# Allegro board fmc_tlu_cfd_04.brd
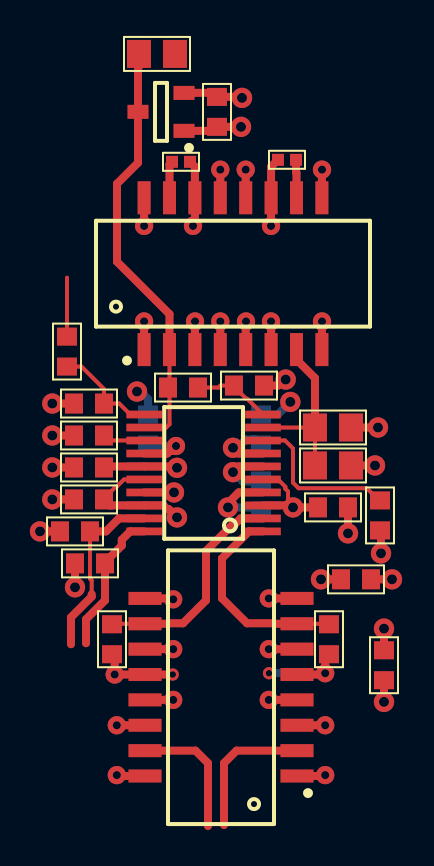
[diagram p0: board, top side]
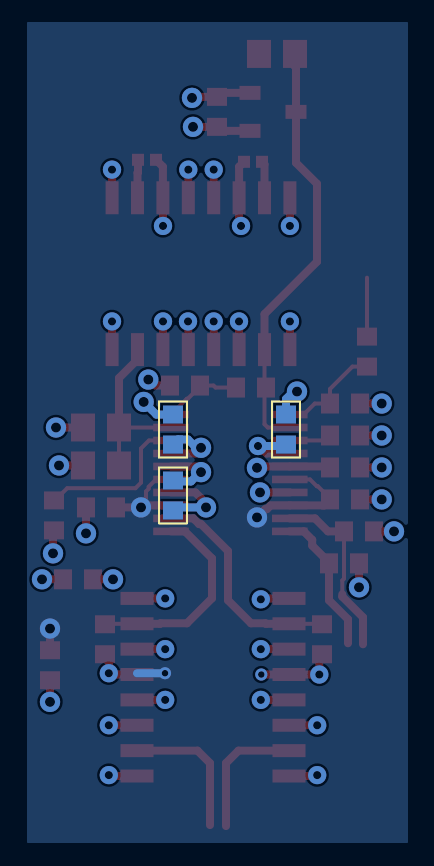
[diagram p1: board, bottom side, seen from below]

No outline. copper layers: TOP, LAYER2, LAYER3, LAYER4, LAYER5, BOTTOM. Coordinates in mm from the lowest, leftmost part position.

## Design rules (mm)
constraint set DEFAULT: min track width 0.127

## Placement (name value [footprint] x y rotation side)
C1  100nF  [C0603]  7.5 28.8 90 top
C2  10nF  [C0603]  1.1 14.2 0 top
C3  1.0uF  [C0603]  15.85 1.1 90 top
C4  1.0uF  [C0603]  14.45 5.4 0 top
C5  100nF  [C0603]  13.3 9 180 top
C6  1.0uF  [C0603]  1.1 11 0 top
C7  100nF  [C0603]  9.7 12.9 270 bottom
C8  100nF  [C0603]  1.1 9.4 0 top
C9  100nF  [C0603]  9.7 9.6 90 bottom
C10  100nF  [C0603]  4.05 12.9 270 bottom
D1  -  [SOT95P240X130-3N]  4.7 28.8 180 top
IC1  -  [SOIC127P835X237-16N]  8.3 20.7 90 top
IC2  -  [TSSOP20MA_065]  9.8 7.8 90 top
IC3  -  [SOIC127P835X237-16N]  7.7 0 180 top
R1  51  [C0402]  5.7 26.3 180 top
R2  12  [C0805]  4.5 31.7 180 top
R3  51  [C0603]  5.8 15 0 top
R4  51  [C0402]  11 26.4 0 top
R5  100  [C0603]  0 16.8 270 top
R6  100  [C0805]  13.3 13 180 top
R7  100  [C0603]  9.1 15.1 180 top
R8  100  [C0805]  13.3 11.1 180 top
R9  33k  [C0603]  1.1 12.6 0 top
R10  XX  [C0603]  15.65 8.6 90 top
R11  75  [C0603]  0.4 7.8 0 top
R12  75  [C0603]  2.25 2.4 90 top
R13  75  [C0603]  1.15 6.2 0 top
R14  75  [C0603]  13.1 2.4 90 top

## Library data of the parts
C1 C5 C7-C10 = CAPCERSMDCL2: part number: CAPCERSMDCL2_0603-100NF,16V; tolerance: 10%
C2 = CAPCERSMDCL2: part number: CAPCERSMDCL2_0603-10NF,50V; tolerance: 10%
C3 C4 C6 = CAPCERSMDCL2: part number: CAPCERSMDCL2_0603-1.0UF,6.3V; tolerance: 10%
D1 = DIODE_DUAL_SERIES: part number: HBAT-540C
IC1 = DELAY_LINE_GL2L: part number: GL2L5LS050D-C
IC2 = MAX9601
IC3 = DELAY_LINE_GL2L: part number: GL2L5LS100D-C
R1 R4 = RSMD0402: part number: RSMD0402_1/16W-51,1%; tolerance: 1%
R2 = RSMD0805: part number: RSMD0805_125MW-12,1%; tolerance: 1%
R3 = RSMD0603: part number: RSMD0603_1/10W-51,1%; tolerance: 1%
R5 R7 = RSMD0603: part number: RSMD0603_1/10W-100,1%; tolerance: 1%
R6 R8 = RSMD0805: part number: RSMD0805_125MW-100,1%; tolerance: 1%
R9 = RSMD0603: part number: RSMD0603_1/10W-33K,1%; tolerance: 1%
R10 = RSMD0603: part number: RSMD0603_1/10W-XX,1%; tolerance: 1%
R11-R14 = RSMD0603: part number: RSMD0603_1/10W-75,1%; tolerance: 1%

## Footprints (pads in the part's own frame, mm; a bottom-side part is the same pattern mirrored in y, then rotated)
C0402
  rect 0.6x0.6 smd: 1(-0.45,0) 2(0.45,0)
C0603
  rect 0.9x1 smd: 1(-0.75,0) 2(0.75,0)
C0805
  rect 1.2x1.4 smd: 1(-0.9,0) 2(0.9,0)
SOIC127P835X237-16N
  rect 1.65x0.65 smd: 1(-3.8,4.445) 2(-3.8,3.175) 3(-3.8,1.905) 4(-3.8,0.635) 5(-3.8,-0.635) 6(-3.8,-1.905) 7(-3.8,-3.175) 8(-3.8,-4.445) 9(3.8,-4.445) 10(3.8,-3.175) 11(3.8,-1.905) 12(3.8,-0.635) 13(3.8,0.635) 14(3.8,1.905) 15(3.8,3.175) 16(3.8,4.445)
SOT95P240X130-3N
  rect 1.05x0.7 smd: 1(-1.15,0.95) 2(-1.15,-0.95) 3(1.15,0)
TSSOP20MA_065
  rect 0.381x1.778 smd: 1(0,0) 2(0.65,0) 3(1.3,0) 4(1.95,0) 5(2.6,0) 6(3.25,0) 7(3.9,0) 8(4.55,0) 9(5.2,0) 10(5.85,0) 11(5.85,5.94) 12(5.2,5.94) 13(4.55,5.94) 14(3.9,5.94) 15(3.25,5.94) 16(2.6,5.94) 17(1.95,5.94) 18(1.3,5.94) 19(0.65,5.94) 20(0,5.94)

## Nets
GND_SIGNAL: C2.1(A<0>) C3.1(A<0>) C4.1(A<0>) C5.1(A<0>) C6.1(A<0>) C7.1(A<0>) C8.1(A<0>) C9.1(A<0>) C10.1(A<0>) IC1.1(SH<0>) IC1.3(SH<1>) IC1.4(SH<2>) IC1.5(SH<3>) IC1.6(SH<4>) IC1.8(SH<5>) IC1.9(SH<6>) IC1.11(SH<7>) IC1.12(SH<8>) IC1.13(SH<9>) IC1.14(SH<10>) IC1.16(SH<11>) IC2.4(LE<0>) IC2.17(LE<0>) IC3.1(SH<0>) IC3.3(SH<1>) IC3.4(SH<2>) IC3.5(SH<3>) IC3.6(SH<4>) IC3.8(SH<5>) IC3.9(SH<6>) IC3.11(SH<7>) IC3.12(SH<8>) IC3.13(SH<9>) IC3.14(SH<10>) IC3.16(SH<11>) R1.1(A<0>) R4.1(A<0>) R6.1(A<0>) R7.1(A<0>) R8.1(A<0>) R9.1(A<0>) R10.1(A<0>) R11.1(A<0>) R12.1(A<0>) R13.1(A<0>) R14.1(A<0>)
P2V5: C3.2(B<0>) C5.2(B<0>) C8.2(B<0>) IC2.3(VCCO_<0>) IC2.5(LE*<0>) IC2.16(LE*<0>) IC2.18(VCCO_<1>)
P5V: C1.2(B<0>) C4.2(B<0>) C7.2(B<0>) C10.2(B<0>) D1.2(C) IC2.7(VCC<0>) IC2.14(VCC<1>)
VIN: R2.1(A<0>)
CFD_OUT: IC3.2(A1)
CFD_OUT*: IC3.15(A2)
LEADING_EDGE_OUT: IC2.20(Q<0>) R13.2(B<0>)
LEADING_EDGE_OUT*: IC2.19(Q*<0>) R11.2(B<0>)
M5V: C1.1(A<0>) C6.2(B<0>) C9.2(B<0>) D1.1(A) IC2.6(VEE<0>) IC2.15(VEE<1>)
UNNAMED_1_CAPCERSMDCL2_I78_B: C2.2(B<0>) IC2.11(IN+<0>) R5.2(B<0>)
UNNAMED_1_DELAYLINEGL2L_I140_A1: D1.3(AC) IC1.2(A1) IC2.12(IN-<0>) R2.2(B<0>) R3.1(A<0>)
UNNAMED_1_DELAYLINEGL2L_I140_A2: IC1.15(A2) R1.2(B<0>)
UNNAMED_1_DELAYLINEGL2L_I140_B2: IC1.10(B2) R4.2(B<0>)
UNNAMED_1_MAX9601_I1_HYS: IC2.8(HYS<0>) R10.2(B<0>)
UNNAMED_1_MAX9601_I1_IN: IC2.10(IN+<0>) R3.2(B<0>) R7.2(B<0>)
UNNAMED_1_MAX9601_I1_IN_1: IC1.7(B1) IC2.9(IN-<0>) R6.2(B<0>) R8.2(B<0>)
UNNAMED_1_MAX9601_I1_Q: IC2.2(Q*<0>) IC3.10(B2) R12.2(B<0>)
UNNAMED_1_MAX9601_I1_Q_1: IC2.1(Q<0>) IC3.7(B1) R14.2(B<0>)
UNNAMED_1_MAX9601_I71_HYS: IC2.13(HYS<0>) R9.2(B<0>)
VTHRESH: R5.1(A<0>)

## Via types
v1: diameter 1.016, hole 0.5, TOP to BOTTOM, 26 vias
v2: diameter 0.61, hole 0.33, TOP to BOTTOM, 2 vias
v3: diameter 0.914, hole 0.406, TOP to BOTTOM, 25 vias

## Routing (per net, layer and track width the routed paths; a pad name or vN(x,y) marks a point on that pad's centre or on a via; arc(x,y) is an arc through that point)
GND_SIGNAL: length 64.9
  TOP w0.4: 3.85,16.9 v3(3.85,18.31) ; v1(8.05,9) 8.05,9.22 8.58,9.75 IC2.4 ; R10.1 15.65,7.66 15.7,7.61 v1(15.7,6.7) ; R13.1 v1(0.4,5) ; 11.5,4.44 v3(10.09,4.44) ; R9.1 v1(-0.74,12.6) ; IC3.14 v3(2.49,-1.91) ; C6.1 v1(-0.74,11) ; v3(12.75,18.31) 12.75,18.2 12.74,18.2 IC1.8 ; C8.1 v1(-0.74,9.4) ; IC1.12 v3(8.93,25.91) ; R14.1 12.91,1.46 v3(12.91,0.7) 12.65,0.7 12.59,0.63 IC3.5 ; C3.1 v1(15.85,-0.74) ; 12.74,24.5 12.74,25.8 12.75,25.8 v3(12.75,25.91) ; IC1.4 v3(7.67,18.31) ; 3.9,4.44 5,4.44 5.05,4.4 v3(5.31,4.4) ; 11.5,-0.64 v3(10.09,-0.64) ; v1(10.93,15.4) 10.85,15.4 10.55,15.1 R7.1 ; 3.9,-0.64 v3(5.31,-0.64) ; v3(10.2,18.31) 10.2,18.3 10.21,18.29 IC1.6 ; v3(10.2,23.09) 10.2,24.49 10.21,24.5 10.21,26.05 R4.1 ; 8.93,16.9 8.93,18.18 8.95,18.2 v3(8.95,18.31) ; v2(5.29,0.63) IC3.12 v3(2.38,0.63) 2.38,1.51 R12.1 ; IC1.16 v3(3.85,23.09) ; R1.1 6.39,26.05 IC1.14 6.39,23.2 6.3,23.1 v3(6.3,23.09) ; IC3.3 v3(12.91,-1.91) ; 7.67,24.5 v3(7.67,25.91) ; IC3.11 v3(5.31,1.9) ; IC3.1 12.65,-4.45 12.7,-4.4 v3(12.91,-4.4) ; IC3.16 2.74,-4.45 2.7,-4.4 v3(2.49,-4.4) ; 6.39,16.9 6.39,18.2 6.4,18.2 v3(6.4,18.31) ; C5.1 v1(14.05,7.7) ; R6.1 v1(15.55,13) ; R11.1 v1(-1.35,7.8) ; IC3.6 v3(10.09,1.9) ; C2.1 v1(-0.74,14.2) ; IC2.17 v1(5.35,9.75) ; R8.1 v1(15.4,11.1) ; C4.1 v1(12.7,5.4)
  BOTTOM w0.4: C9.1 9.55,9 v1(8.05,9) ; v1(3.5,14.8) 3.68,14.8 4.05,14.43 C10.1 ; v1(11.17,14.28) 10.54,13.65 C7.1
P2V5: length 14.2
  TOP w0.2: IC2.16 2.85,10.4 2.51,10.06 2.46,10.06 1.85,9.45 ; v1(11.3,9) 11.05,9.25 11.05,9.8 10.92,9.93 10.92,10.03 10.55,10.4 IC2.5
  TOP w0.4: v1(15.85,2.93) C3.2 ; C5.2 v1(11.3,9) 11.02,9 10.92,9.1 IC2.3 ; 1.85,9.45 C8.2 2.15,9.1 IC2.18 4.82,9.1 5,8.91 5.08,8.91 v1(5.5,8.5)
  BOTTOM w0.4: 11.5,0.7 v2(10.1,0.7)
P5V: length 10.5
  TOP w0.4: C4.2 v1(16.25,5.4) ; v1(8.75,29.5) 8.7,29.55 C1.2 7.3,29.75 D1.2 ; IC2.7 8.58,11.7 v1(8.3,11.98) ; IC2.14 5.02,11.7 5.15,11.83 5.21,11.83 v3(5.45,12.07)
  BOTTOM w0.4: v3(5.45,12.07) 4.13,12.07 C10.2 ; C7.2 9.45,12.4 8.95,12.4 8.53,11.98 v1(8.3,11.98)
CFD_OUT: length 7
  TOP w0.4: IC3.2 8.47,-3.18 7.85,-3.8 7.85,-6.9
CFD_OUT*: length 6.6
  TOP w0.4: 7.05,-6.95 7.05,-3.8 6.42,-3.18 IC3.15
LEADING_EDGE_OUT: length 7.2
  TOP w0.4: IC2.20 3.16,7.8 2.74,7.38 2.74,7.09 1.9,6.25 R13.2 1.9,4.35 0.95,3.4 0.95,2.2
LEADING_EDGE_OUT*: length 9.1
  TOP w0.2: 1.23,4.65 1.23,5.35 1.15,5.43 R11.2
  TOP w0.4: R11.2 1.95,7.8 2.6,8.45 IC2.19 ; 0.2,2.15 0.2,3.5 1.23,4.54 1.23,4.65
M5V: length 9.8
  TOP w0.4: IC2.6 8.58,11.05 v1(8.3,10.77) ; v1(5.5,10.98) 5.43,11.05 IC2.15 1.9,11.05 C6.2 ; D1.1 7.02,27.85 7.3,27.93 7.42,28.05 C1.1 v1(8.7,28.05)
  BOTTOM w0.4: v1(8.3,10.77) 8.33,10.77 8.8,10.3 9.65,10.3 C9.2
UNNAMED_1_CAPCERSMDCL2_I78_B: length 5.3
  TOP w0.2: R5.2 0.73,16.05 1.85,14.93 C2.2 2.61,14.2 3.16,13.65 IC2.11
UNNAMED_1_DELAYLINEGL2L_I140_A1: length 21.5
  TOP w0.2: 5.12,15.07 IC1.2 ; 5.12,15.07 5.12,13.16 4.96,13 IC2.12 ; 5.12,15.07 R3.1
  TOP w0.4: IC1.2 5.12,18.67 2.5,21.3 2.5,25.2 3.55,26.25 D1.3 3.55,31.02 3.6,31.07 R2.2
UNNAMED_1_DELAYLINEGL2L_I140_A2: length 1.9
  TOP w0.4: 5.12,24.5 5.12,26.17 R1.2
UNNAMED_1_DELAYLINEGL2L_I140_B2: length 1.9
  TOP w0.4: R4.2 11.45,25.77 11.47,25.75 IC1.10
UNNAMED_1_MAX9601_I1_HYS: length 8.1
  TOP w0.2: IC2.8 10.9,12.35 11.3,11.95 11.3,10.24 11.58,9.96 14.99,9.96 15.6,9.35 R10.2
UNNAMED_1_MAX9601_I1_IN: length 3.9
  TOP w0.2: R3.2 7.57,15 7.67,15.1 R7.2 8.35,15.05 8.96,14.44 9.01,14.44 IC2.10
UNNAMED_1_MAX9601_I1_IN_1: length 8.8
  TOP w0.2: R8.2 R6.2 12.4,13.1 12.3,13 IC2.9
  TOP w0.4: 12.4,13.1 12.4,15.47 11.47,16.4 11.47,16.9
UNNAMED_1_MAX9601_I1_Q: length 11.2
  TOP w0.127: 2.27,3.17 R12.2
  TOP w0.2: IC3.10 2.27,3.17
  TOP w0.4: IC2.2 8.68,8.45 8.4,8.16 8.3,8.16 6.95,6.82 6.95,4.35 5.8,3.2 5.08,3.2 5.05,3.17 IC3.10
UNNAMED_1_MAX9601_I1_Q_1: length 10.5
  TOP w0.127: 13.07,3.17 R14.2
  TOP w0.2: IC3.7 13.07,3.17
  TOP w0.4: IC2.1 9.1,7.8 7.75,6.45 7.75,4.45 9,3.2 10.32,3.2 10.35,3.17 IC3.7
UNNAMED_1_MAX9601_I71_HYS: length 2.1
  TOP w0.2: R9.2 2.1,12.35 IC2.13
VTHRESH: length 3
  TOP w0.2: R5.1 0,20.5

## Copper pours and planes (outline as drawn; the poured copper is in the pictures)
GND_SIGNAL on LAYER2, LAYER5: -2.05,33.3 -2.05,-7.8 17,-7.8 17,33.3
P2V5 on BOTTOM: -2.05,-7.8 17,-7.8 17,33.3 -2.05,33.3
P5V on LAYER3: -2.05,33.3 -2.05,-7.8 17,-7.8 17,33.3
M5V on LAYER4: -2.05,33.3 -2.05,-7.8 17,-7.8 17,33.3
